# Altium PCB frontbreakoutPCB.PcbDoc (part 1 of 2)
Units mil, origin at the board's own origin, x right, y up, seen from the top; angles counter-clockwise.
Board outline 4390 x 2730 mil, 2 copper layers (Top Layer, Bottom Layer); 90 components, 124 nets, 373 pads, 85 vias.
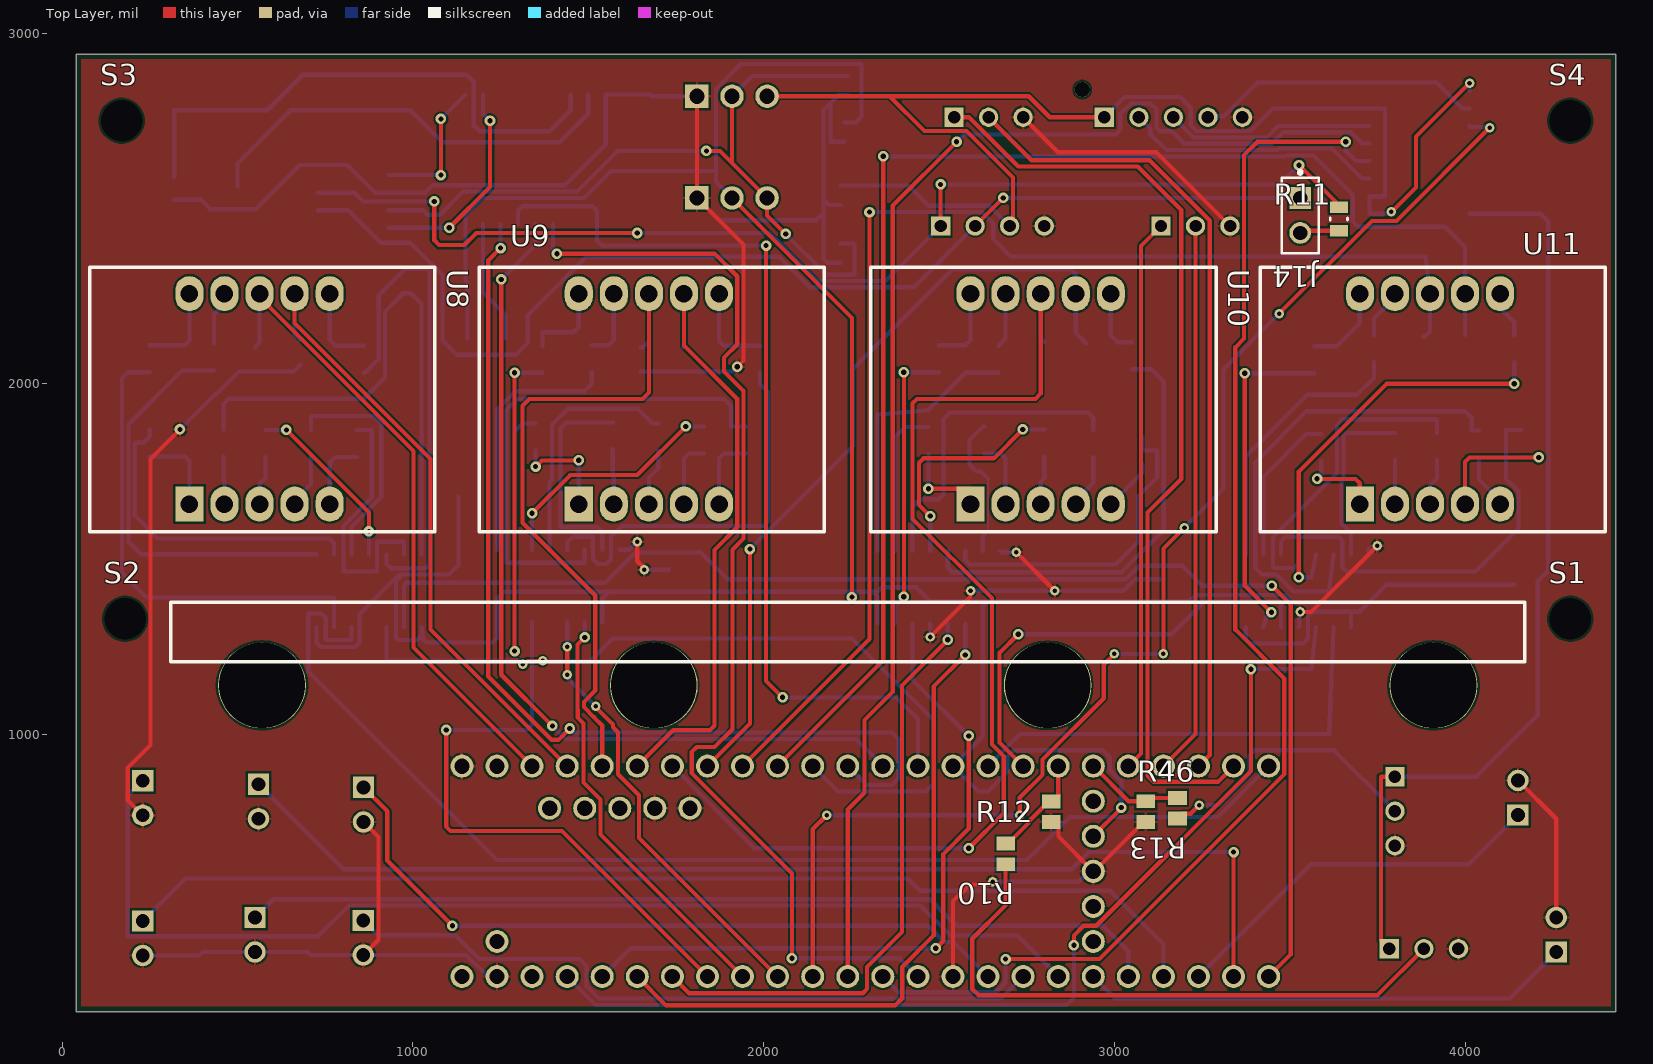
[diagram p0: Top Layer view]
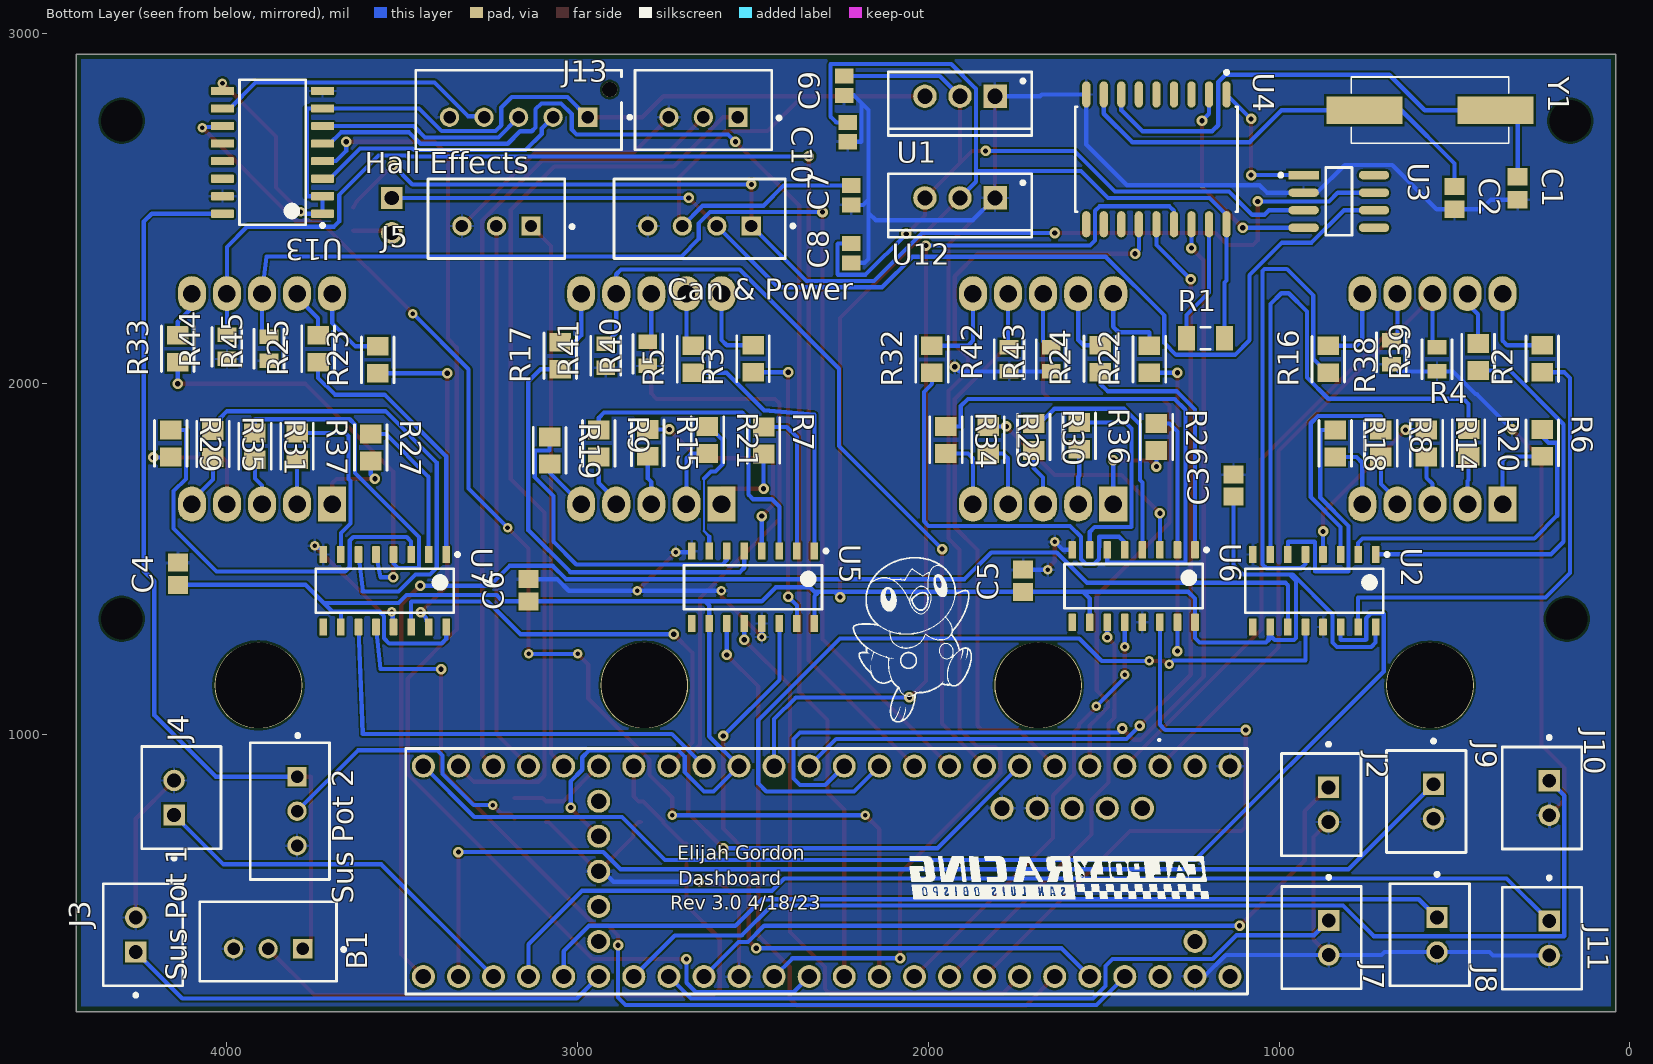
[diagram p1: Bottom Layer view, seen from below]
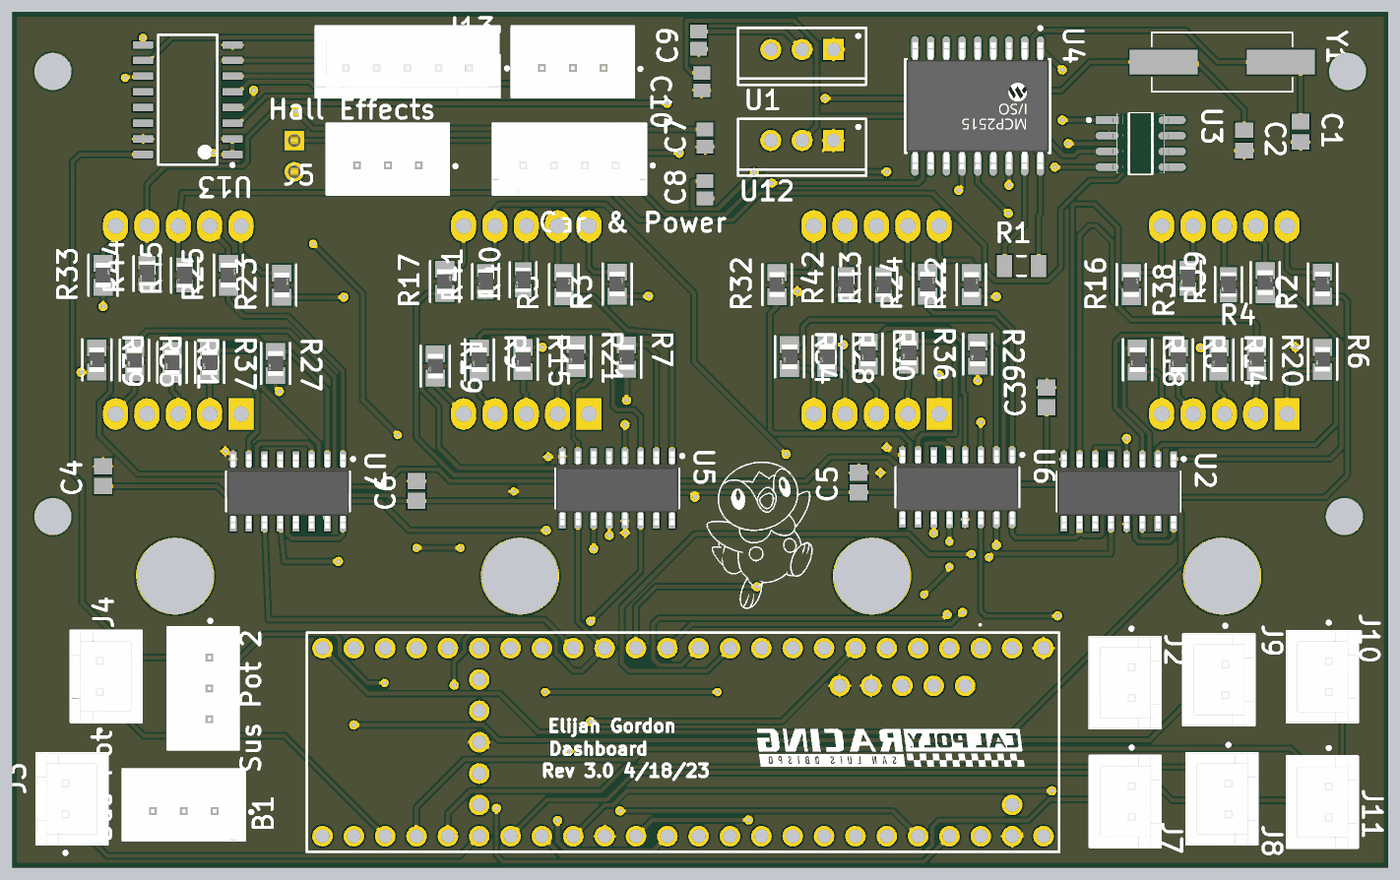
[diagram p2: 3D render of the assembled board from below, using the file's embedded part models]

## Layer stack, top to bottom
Top Solder: solder mask 0.4, Solder Resist, Dk 3.5
Top Layer: signal copper 1.4
Dielectric 1: dielectric 12.6, FR-4, Dk 4.8
Bottom Layer: signal copper 1.4
Bottom Solder: solder mask 0.4, Solder Resist, Dk 3.5

## Board outline
40,210 40,2940 4430,2940 4430,210

## Design rules (kind name [scope] priority, off if disabled: settings)
BoardOutlineClearance [All] p1: gap=15 ignorepadtopadclearanceinfootprint=FALSE
Clearance [All] p1: gap=6 ignorepadtopadclearanceinfootprint=FALSE except(0: Arc-Hole Track-Hole SMDPad-Hole THPad-Hole Via-Hole Fill-Hole Poly-Hole Region-Hole Text-Hole)
ComponentClearance [All] p1: gap=1 collisioncheckmode=3 verticalgap=1 showdistances=FALSE
DiffPairsRouting [All] p1: maxlimit=393.7 minlimit=6 mostfreqgap=8 toplayer_minwidth=6 toplayer_maxwidth=15 toplayer_prefwidth=8 bottomlayer_minwidth=6 bottomlayer_maxwidth=15 bottomlayer_prefwidth=8 maxuncoupledlength=500
HoleSize [All] p1: absolutevalues=TRUE maxlimit=265 minlimit=13 maxpercent=80.000 minpercent=20.000
HoleToHoleClearance [All] p1: gap=10 allowstackedmicrovias=FALSE
MinimumAnnularRing [All] p1: minimumring=7
MinimumSolderMaskSliver [All] p1: minsoldermaskwidth=0
PlaneClearance [All] p1: clearance=10
PlaneConnect [All] p1: planeconnectstyle=Direct reliefexpansion=16 reliefentries=4 reliefconductorwidth=6 reliefairgap=6
PolygonConnect [All] p1: connectstyle=Relief reliefconductorwidth=8 reliefentries=4 polygonreliefangle="90 Angle" airgapwidth=6
RoutingCorners [All] p1: cornerstyle=45-Degree minsetback=49.21 maxsetback=49.21
RoutingVias [All] p1: holewidth=15 width=30 viastyle="Through Hole" minholewidth=13 minwidth=27 maxholewidth=100 maxwidth=114
SilkToSilkClearance [All] p1: silktosilkclearance=0
SilkToSolderMaskClearance [IsPad] p1: minsilkscreentomaskgap=6 clearancetoexposedcopper=TRUE
SolderMaskExpansion [All] p1: expansion=2.95 istentingtop=FALSE
Width [All] p1: maxlimit=400 minlimit=6 preferedwidth=12 minimp=50.000000 maximp=50.000000 favimp=50.000000
20 further rules are at their usual default settings.

## Classes and differential pairs
component class moreConnectors: "Hall Effects" R10 R12 R13 R46 "Sus Pot 1" "Sus Pot 2" U13
component class ssegs_and_registers: C3 C4 C5 C6 R2 R3 R4 R5 R6 R7 R8 R9 R14 R15 R16 R17 R18 R19 R20 R21 R22 R23 R24 R25 R26 R27 R28 R29 R30 R31 R32 R33 R34 R35 R36 R37 U2 U5 U6 U7
component class SEX: R38 R39 R40 R41 R42 R43 R44 R45 S1 S2 S3 S4 U8 U9 U10 U11
component class frontbreakoutSchematic: B1 C7 C8 C9 C10 "Can & Power" J2 J3 J4 J5 J7 J8 J9 J10 J11 J13 U1 U12
component class CAN: C1 C2 J14 R1 R11 U3 U4 Y1

## Components (designator, comment, footprint, x,y, rotation, side; value= is the part's Value field where it differs from the comment)
B1 "TEENSY_4.1" TEENSY41 1340,910 r0 bottom
C1 "22pf_MCP1" CAPC2013X145X50NL20T20 320,2557.52 r270 bottom
C2 "22pf_MCP2" CAPC2013X145X50NL20T20 500,2530 r270 bottom
C3 "0.1 µF" CAPC2013X140X50NL20T25 1130,1710 r90 bottom
C4 "0.1 µF" CAPC2013X140X50NL20T25 4140,1458.5 r90 bottom
C5 "0.1 µF" CAPC2013X140X50NL20T25 1730,1438.5 r90 bottom
C6 "0.1 µF" CAPC2013X140X50NL20T25 3140,1411.5 r90 bottom
C7 "1uF" CAPC2013X145X50LL20T25 2220,2537.56 r90 bottom
C8 "1uF" CAPC2013X145X50LL20T25 2220,2372.44 r90 bottom
C9 "1uF" CAPC2013X145X50LL20T25 2240,2850 r90 bottom
C10 "1uF" CAPC2013X145X50LL20T25 2230,2717.56 r90 bottom
"Can & Power" "B4B-XH-A(LF)(SN)" FP-B4B-XH-A_LF_SN-MFG 2652.36,2470.67 r180 bottom
"Hall Effects" "B5B-XH-AM(LF)(SN)" FP-B5B-XH-AM_LF_SN-MFG 3168.43,2780.67 r180 bottom
J2 "B2B-XH-A(LF)(SN)" FP-B2B-XH-A_LF_SN-MFG 880,800 r270 bottom
J3 "B2B-XH-A(LF)(SN)" FP-B2B-XH-A_LF_SN-MFG 4239.33,429.21 r90 bottom
J4 "B2B-XH-A(LF)(SN)" FP-B2B-XH-A_LF_SN-MFG 4130,820 r90 bottom
J5 "B3B-XH-A(LF)(SN)" FP-B3B-XH-A_LF_SN-MFG 3231.57,2470.67 r0 bottom
J7 "B2B-XH-A(LF)(SN)" FP-B2B-XH-A_LF_SN-MFG 879.33,420.79 r270 bottom
J8 "B2B-XH-A(LF)(SN)" FP-B2B-XH-A_LF_SN-MFG 570.67,429.21 r270 bottom
J9 "B2B-XH-A(LF)(SN)" FP-B2B-XH-A_LF_SN-MFG 580.67,809.21 r270 bottom
J10 "B2B-XH-A(LF)(SN)" FP-B2B-XH-A_LF_SN-MFG 250.67,819.21 r270 bottom
J11 "B2B-XH-A(LF)(SN)" FP-B2B-XH-A_LF_SN-MFG 250.67,419.21 r270 bottom
J13 "B3B-XH-A(LF)(SN)" FP-B3B-XH-A_LF_SN-MFG 2641.57,2780.67 r0 bottom
J14 "TSW-102-07-L-S" FP-TSW-102-07-L-S-MFG 3530,2480 r270 top
R1 "10k" RESC3116X65X50NL20T20 1210,2130 r180 bottom
R2 "200" FP-RG2012-IPC_A 250,2071.59 r90 bottom
R3 "200" FP-RG2012-IPC_A 2500,2071.59 r90 bottom
R4 "200" FP-RG2012-IPC_A 432.81,2076.24 r90 bottom
R5 "200" FP-RG2012-IPC_A 2670,2070 r90 bottom
R6 "200" FP-RG2012-IPC_A 250,1831.59 r270 bottom
R7 "200" FP-RG2012-IPC_A 2470,1838.41 r270 bottom
R8 "200" FP-RG2012-IPC_A 710,1830 r270 bottom
R9 "200" FP-RG2012-IPC_A 2940,1830 r270 bottom
R10 "10k_RBP_VD1" RESC2013X60X40LL20T25 2690,660 r270 top
R11 "120_MCP" FP-CRCW0805-e3-IPC_C 3640,2470 r270 top
R12 "10k_RBP_VD1" RESC2013X60X40LL20T25 2820,780 r90 top
R13 "10k_RBP_VD1" RESC2013X60X40LL20T25 3180,790 r270 top
R14 "200" FP-RG2012-IPC_A 580,1830 r270 bottom
R15 "200" FP-RG2012-IPC_A 2800,1831.59 r270 bottom
R16 "200" FP-RG2012-IPC_A 860,2070 r90 bottom
R17 "200" FP-RG2012-IPC_A 3050,2080 r90 bottom
R18 "200" FP-RG2012-IPC_A 840,1830 r270 bottom
R19 "200" FP-RG2012-IPC_A 3080,1810 r270 bottom
R20 "200" FP-RG2012-IPC_A 460,1831.59 r270 bottom
R21 "200" FP-RG2012-IPC_A 2630,1840 r270 bottom
R22 "200" FP-RG2012-IPC_A 1370,2070 r90 bottom
R23 "200" FP-RG2012-IPC_A 3570,2068.41 r90 bottom
R24 "200" FP-RG2012-IPC_A 1510,2071.59 r90 bottom
R25 "200" FP-RG2012-IPC_A 3740,2100 r90 bottom
R26 "200" FP-RG2012-IPC_A 1350,1848.41 r270 bottom
R27 "200" FP-RG2012-IPC_A 3590,1818.41 r270 bottom
R28 "200" FP-RG2012-IPC_A 1830,1840 r270 bottom
R29 "200" FP-RG2012-IPC_A 4160,1830 r270 bottom
R30 "200" FP-RG2012-IPC_A 1700,1848.41 r270 bottom
R31 "200" FP-RG2012-IPC_A 3920,1821.59 r270 bottom
R32 "200" FP-RG2012-IPC_A 1990,2070 r90 bottom
R33 "200" FP-RG2012-IPC_A 4140,2100 r90 bottom
R34 "200" FP-RG2012-IPC_A 1950,1840 r270 bottom
R35 "200" FP-RG2012-IPC_A 4040,1828.41 r270 bottom
R36 "200" FP-RG2012-IPC_A 1570,1851.59 r270 bottom
R37 "200" FP-RG2012-IPC_A 3800,1821.59 r270 bottom
R38 "ESR10EZPJ472" FP-ESR10-IPC_B 680,2090 r90 bottom
R39 "ESR10EZPJ472" FP-ESR10-IPC_B 550,2070 r90 bottom
R40 "ESR10EZPJ472" FP-ESR10-IPC_B 2800,2085.47 r90 bottom
R41 "ESR10EZPJ472" FP-ESR10-IPC_B 2920,2080 r90 bottom
R42 "ESR10EZPJ472" FP-ESR10-IPC_B 1770,2070 r90 bottom
R43 "ESR10EZPJ472" FP-ESR10-IPC_B 1650,2070 r90 bottom
R44 "200" FP-ESR10-IPC_B 4000,2105.47 r90 bottom
R45 "ESR10EZPJ472" FP-ESR10-IPC_B 3880,2100 r90 bottom
R46 "10k_RBP_VD1" RESC2013X60X40LL20T25 3090,780.47 r90 top
S1 "Screw M3" "Screw M3" 4300,1330 r0 top
S2 "Screw M3" "Screw M3" 180,1330 r0 top
S3 "Screw M3" "Screw M3" 170,2750 r0 top
S4 "Screw M3" "Screw M3" 4300,2750 r0 top
"Sus Pot 1" "B3B-XH-A(LF)(SN)" FP-B3B-XH-A_LF_SN-MFG 3882.64,410 r0 bottom
"Sus Pot 2" "B3B-XH-A(LF)(SN)" FP-B3B-XH-A_LF_SN-MFG 3820.67,781.57 r270 bottom
U1 "LD1117V50" TO220 1910,2820 r0 bottom
U2 "SN74HC595DRG3" D0016A_L 900,1410 r270 bottom
U3 "TJA1050T/CM,118" FP-SOT96-1-IPC_A 830,2520 r180 bottom
U4 "MCP2515-I/SO" FP-C04-051-MFG 1350,2640 r270 bottom
U5 "SN74HC595DRG3" D0016A_L 2500,1420 r270 bottom
U6 "SN74HC595DRG3" D0016A_L 1415,1423.35 r270 bottom
U7 "SN74HC595DRG3" D0016A_L 3550,1410 r270 bottom
U8 "Dual Seven Segment Display" DIP10 363,1657 r0 top
U9 "Dual Seven Segment Display" DIP10 1473,1657 r0 top
U10 "Dual Seven Segment Display" DIP10 2590,1657 r0 top
U11 "Dual Seven Segment Display" DIP10 3700,1657 r0 top
U12 "LD1117V33" TO220 1910,2530 r0 bottom
U13 "CD40109BNSR" NS0016A_N 3870,2660 r0 bottom
Y1 "ECS-80-20-5PXDU-TR" XTAL_ECS-80-20-5PXDU-TR 570,2780 r180 bottom

## Footprints (in the part's own frame and the unit in brackets; to place one, negate y for a bottom-side part, rotate by r counter-clockwise, add the part's x,y. Pads: shape width x height; smd on the part's side, far side on the other; paste and mask are expansions set on the pad)
CAPC2013X140X50NL20T25 [mm] "Chip Capacitor, 2-Leads, Body 2.00x1.25mm, IPC Medium Density"
  rect 1.3x1.45 smd: 1(-0.8,0) 2(0.8,0)
  body extent -1.1,-0.72 1.1,0.72, height 1.4
CAPC2013X145X50LL20T25 [mm] "Chip Capacitor, 2-Leads, Body 2.00x1.25mm, IPC High Density"
  rect 1.1x1.35 smd: 1(-0.7,0) 2(0.7,0)
  body extent -1.1,-0.72 1.1,0.72, height 1.45
CAPC2013X145X50NL20T20 [mm] "Chip Capacitor, 2-Leads, Body 2.00x1.25mm, IPC Medium Density"
  rect 1.25x1.45 smd: 1(-0.825,0) 2(0.825,0)
  body extent -1.1,-0.72 1.1,0.72, height 1.45
D0016A_L [mm] "SOIC, 16-Leads, Body 10x4mm, Pitch 1.27mm, IPC High Density"
  rrect18% 1.25x0.55 smd: 1(-2.625,4.445) 2(-2.625,3.175) 3(-2.625,1.905) 4(-2.625,0.635) 5(-2.625,-0.635) 6(-2.625,-1.905) 7(-2.625,-3.175) 8(-2.625,-4.445) 9(2.625,-4.445) 10(2.625,-3.175) 11(2.625,-1.905) 12(2.625,-0.635) 13(2.625,0.635) 14(2.625,1.905) 15(2.625,3.175) 16(2.625,4.445)
  silkscreen extent -2.75,-5 1.6,5.39, body extent -3,-4.95 3,4.95, height 1.59
DIP10 [mil]
  rect 80x100 hole 50: 1(0,0)
  oval 80x100 hole 50: 2(100,0) 3(200,0) 4(300,0) 5(300,600) 6(400,600) 7(400,0) 8(100,600) 9(0,600) 10(200,600)
  silkscreen extent -284,-79 700,675
FP-B2B-XH-A_LF_SN-MFG [mm]
  rect 1.55x1.55 hole 1 paste-1000 mask+0: 1(-1.25,0.525)
  round 1.55 hole 1 paste-1000 mask+0: 2(1.25,0.525)
  silkscreen extent -4.5,-2.88 3.7,2.87, body extent -3.7,-2.88 3.7,2.88, height 7
FP-B3B-XH-A_LF_SN-MFG [mm]
  rect 1.4x1.4 hole 0.9 paste-1000 mask+0: 1(-2.5,0.525)
  round 1.4 hole 0.9 paste-1000 mask+0: 2(0,0.525) 3(2.5,0.525)
  silkscreen extent -5.6,-2.87 4.95,2.88, body extent -4.95,-2.88 4.95,2.89, height 7
FP-B4B-XH-A_LF_SN-MFG [mm]
  rect 1.4x1.4 hole 0.9 paste-1000 mask+0: 1(3.75,-0.525)
  round 1.4 hole 0.9 paste-1000 mask+0: 2(1.25,-0.525) 3(-1.25,-0.525) 4(-3.75,-0.525)
  silkscreen extent -6.2,-2.87 6.87,2.88, body extent -6.2,-2.88 6.2,2.88, height 7
FP-B5B-XH-AM_LF_SN-MFG [mm]
  rect 1.4x1.4 hole 0.9 paste-1000 mask+0: 1(5,-0.525)
  round 1.4 hole 0.9 paste-1000 mask+0: 2(2.5,-0.525) 3(0,-0.525) 4(-2.5,-0.525) 5(-5,-0.525)
  round 1.1 hole 1.1 unplated paste-1000 mask+0: ""(6.6,1.475)
  silkscreen extent -7.45,-2.88 8.17,2.87, body extent -7.45,-2.88 7.45,2.88, height 7
FP-C04-051-MFG [mm]
  rrect100% 1.9x0.6 smd paste+0 mask+0: 1(-4.7,5.08) 2(-4.7,3.81) 3(-4.7,2.54) 4(-4.7,1.27) 5(-4.7,0) 6(-4.7,-1.27) 7(-4.7,-2.54) 8(-4.7,-3.81) 9(-4.7,-5.08) 10(4.7,-5.08) 11(4.7,-3.81) 12(4.7,-2.54) 13(4.7,-1.27) 14(4.7,0) 15(4.7,1.27) 16(4.7,2.54) 17(4.7,3.81) 18(4.7,5.08)
  silkscreen extent -6.42,-5.88 3.8,5.88, body extent -5.15,-5.77 5.15,5.77, height 2.65
FP-CRCW0805-e3-IPC_C [mil]
  rect 31.75x51.5 smd paste+0 mask+0: 1(-33.5,0) 2(33.5,0)
  silkscreen extent -3,-25 3,25, body extent -53,-31 53,31, height 10
FP-ESR10-IPC_B [mil]
  rect 41.66x53.63 smd paste+0 mask+0: 1(-34.53,0) 2(34.53,0)
  silkscreen extent -55,-43 55,43, body extent -39,-25 39,25, height 26
FP-RG2012-IPC_A [mil]
  rect 53.34x61.27 smd paste+0 mask+0: 1(-38.41,0) 2(38.41,0)
  silkscreen extent -65,-46 65,46, body extent -39,-25 39,25, height 20
FP-SOT96-1-IPC_A [mil]
  rect 86.79x23.94 smd paste+0 mask+0: 1(-100.43,75)
  rrect100% 86.79x23.94 smd paste+0 mask+0: 2(-100.43,25) 3(-100.43,-25) 4(-100.43,-75) 5(100.43,-75) 6(100.43,-25) 7(100.43,25) 8(100.43,75)
  silkscreen extent -170,-96 37,96, body extent -118,-96 118,96, height 69
FP-TSW-102-07-L-S-MFG [mm]
  rect 1.57x1.57 hole 1.02 paste-1000 mask+0: 1(-1.27,0)
  round 1.57 hole 1.02 paste-1000 mask+0: 2(1.27,0)
  silkscreen extent -3.25,-1.34 2.73,1.34, body extent -2.83,-1.44 2.83,1.44, height 0.25
NS0016A_N [mm] "SOIC,16-Leads,Body 10.5x5.6mm,Pitch 1.27mm,IPC Medium Density"
  rrect17% 1.65x0.6 smd: 1(-3.625,4.445) 2(-3.625,3.175) 3(-3.625,1.905) 4(-3.625,0.635) 5(-3.625,-0.635) 6(-3.625,-1.905) 7(-3.625,-3.175) 8(-3.625,-4.445) 9(3.625,-4.445) 10(3.625,-3.175) 11(3.625,-1.905) 12(3.625,-0.635) 13(3.625,0.635) 14(3.625,1.905) 15(3.625,3.175) 16(3.625,4.445)
  silkscreen extent -3.75,-5.25 2.4,5.42, body extent -2.8,-5.25 2.8,5.25, height 2
RESC2013X60X40LL20T25 [mm] "Chip Resistor, 2-Leads, Body 2.00x1.25mm, IPC High Density"
  rect 1x1.35 smd: 1(-0.75,0) 2(0.75,0)
  body extent -1.1,-0.72 1.1,0.72, height 0.6
RESC3116X65X50NL20T20 [mm] "Chip Resistor, 2-Leads, Body 3.10x1.60mm, IPC Medium Density"
  rect 1.25x1.8 smd: 1(-1.375,0) 2(1.375,0)
  silkscreen extent -0.35,-0.8 0.35,0.8, body extent -1.65,-0.9 1.65,0.9, height 0.65
"Screw M3" [mm]
  round 0 hole 3: x(0,0)
TEENSY41 [mm]
  round 1.665 hole 1.11: 1(0,0) 2(2.54,0) 3(5.08,0) 4(7.62,0) 5(10.16,0) 6(12.7,0) 7(15.24,0) 8(17.78,0) 9(20.32,0) 10(22.86,0) 11(25.4,0) 12(27.94,0) 13(27.94,15.24) 14(25.4,15.24) 15(22.86,15.24) 16(20.32,15.24) 17(17.78,15.24) 18(15.24,15.24) 19(12.7,15.24) 20(10.16,15.24) 21(7.62,15.24) 22(5.08,15.24) 23(2.54,15.24) 24(33.02,0) 25(35.56,0) 26(38.1,0) 27(40.64,0) 28(43.18,0) 29(45.72,0) 30(48.26,0) 31(50.8,0) 32(53.34,0) 33(53.34,15.24) 34(50.8,15.24) 35(48.26,15.24) 36(45.72,15.24) 37(43.18,15.24) 38(40.64,15.24) 39(38.1,15.24) 40(35.56,15.24) 41(33.02,15.24) 42(30.48,0) 43(40.64,2.54) 44(40.64,5.08) 45(40.64,7.62) 46(40.64,10.16) 47(40.64,12.7) 48(11.43,3.05) 49(8.89,3.05) 50(6.35,3.05) 51(3.81,3.05) 52(1.27,3.05) 53(0,15.24) 55(-5.08,15.24) 57(-2.54,0) 68(-2.54,12.7) 69(30.48,15.24) 70(-2.54,15.24) 71(-5.08,0)
  silkscreen extent -6.35,-1.95 54.61,16.51
TO220 [mm] "TO, Thru-Hole, Vertical, Heatsink Mounted; 3 In-Line Leads; Pitch 2.54 mm"
  rect 1.7x1.7 hole 1.1: 1(-2.54,0)
  round 1.7 hole 1.1: 2(0,0) 3(2.54,0)
  silkscreen extent -5.2,-1.75 5.2,2.85, body extent -5.25,-1.8 5.25,2.9, height 19.7
XTAL_ECS-80-20-5PXDU-TR [mm]
  rect 5.5x2 smd: 1(-4.75,0) 2(4.75,0)
  silkscreen extent -5.7,-2.4 5.7,2.4

## Part data
B1: "Teensy 4.1 Development Board", Manufacturer_Name=PJRC, Manufacturer_Part_Number="TEENSY 4.1", Datasheet Link=https://www.pjrc.com/store/teensy41.html
C1 C2: library part CMP-1036-01227-2, Manufacturer=Vitramon, Part Number=VJ0805A220GXXCW1BC
C3 C4 C5 C6: library part CMP-2007-04629-1, Manufacturer="AVX Interconnect / Elco", Part Number=08055C104K4Z2A
C7 C8 C9 C10: library part CMP-1036-04746-2, "C0805C105K4PACTU", Manufacturer=Kemet, Part Number=C0805C105K4PACTU
"Can & Power": library part CMP-17439-000250-1, "CONN HEADER VERT 4POS 2.5MM", Color=Natural, Contact Resistance=20mR, Current Rating=3A, Flammability Rating="UL94 V-0", Housing Color=White, Insulation Resistance=1GR, Max Operating Temperature=85°C, Max Voltage Rating (AC)=250V, Min Operating Temperature=-25°C, Package Quantity=500, Connector Type=Header, Contact Finish - Mating=TIN, Contact Material=Brass, Contact Plating=Tin, Contact Shape=Square, Contact Type="Male Pin", Depth=5.75mm, Fastening Type=Detent, Gender=Male, Housing Material=Polyamide, Insulation Color=Natural, Insulation Material=Nylon, Lead Free="Lead Free", Lead Pitch=2.5mm, Length=12.4mm, Mated Stacking Heights=9.8mm, Material=Polyamide, Max Current Rating=3A, Max Voltage Rating (DC)=250V, Mount="Through Hole", Number of Contacts=4, Number of Positions=4, Number of Rows=1, Orientation=Straight, Packaging=Bulk, Pitch=2.5mm, REACH SVHC="No SVHC", Series=XH, Termination=Solder, Voltage Rating=250V, Voltage Rating (AC)=250V, Wire/Cable Gauge=22AWG
"Hall Effects": library part CMP-17439-000304-1, "CONN HEADER VERT 5POS 2.5MM", Color=Green, Contact Resistance=20mR, Flammability Rating="UL94 V-0", Housing Color=White, Insulation Color=Natural, Max Current Rating=3A, Max Operating Temperature=85°C, Max Voltage Rating (AC)=250V, Min Operating Temperature=-25°C, Connector Type=Header, Contact Finish - Mating=TIN, Contact Material=Brass, Contact Plating=Copper, Contact Shape=Square, Contact Type="Male Pin", Depth=5.75mm, Fastening Type=Detent, Housing Material=Polyamide, Insulation Material=Nylon, Lead Free="Lead Free", Length=14.9mm, Mated Stacking Heights=9.8mm, Mount="Through Hole", Number of Positions=5, Number of Rows=1, Orientation=Straight, Packaging=Bulk, Pitch=2.5mm, Series=XH, Termination=Solder, Voltage Rating=250V
J2 J3 J4 J7 J8 J9 J10 J11: library part CMP-2000-05888-3, "CONN HEADER VERT 2POS 2.5MM", Color=Natural, Contact Resistance=20mR, Current Rating=3A, Housing Color=White, Insulation Resistance=1GR, Max Operating Temperature=85°C, Max Voltage Rating (AC)=250V, Min Operating Temperature=-25°C, Connector Type="Male Pin", Contact Material=Brass, Contact Plating=Tin, Contact Type="Male Pin", Depth=5.75mm, Fastening Type=Detent, Housing Material=Polyamide, Lead Free="Lead Free", Lead Pitch=2.5mm, Length=7.4mm, Max Current Rating=3A, Max Voltage Rating (DC)=250V, Mount="Through Hole", Number of Contacts=2, Number of Positions=2, Number of Rows=1, Orientation=Straight, Packaging=Bulk, Pitch=2.5mm, REACH SVHC="No SVHC", Series=XH, Termination=Solder, Voltage Rating=250V, Voltage Rating (AC)=250V, Wire/Cable Gauge=22AWG
J5 J13 "Sus Pot 1" "Sus Pot 2": library part CMP-17439-000014-3, "CONN HEADER VERT 3POS 2.5MM", Color=Natural, Contact Resistance=20mR, Current Rating=3A, Flammability Rating="UL94 V-0", Housing Color=White, Insulation Resistance=1GR, Max Operating Temperature=85°C, Max Voltage Rating (AC)=250V, Min Operating Temperature=-25°C, Connector Type=Header, Contact Finish - Mating=TIN, Contact Material=Brass, Contact Plating=Tin, Contact Shape=Square, Contact Type="Male Pin", Depth=5.75mm, Fastening Type=Detent, Gender=Male, Housing Material=Polyamide, Insulation Color=Natural, Insulation Material=Nylon, Lead Free="Lead Free", Lead Pitch=2.5mm, Length=9.9mm, Max Current Rating=3A, Max Voltage Rating (DC)=250V, Mount="Through Hole", Number of Contacts=3, Number of Positions=3, Number of Rows=1, Orientation=Straight, Packaging=Bulk, Pitch=2.5mm, REACH SVHC="No SVHC", Series=XH, Termination=Solder, Voltage Rating=250V, Voltage Rating (AC)=250V, Wire/Cable Gauge=22AWG
J14: library part CMP-02766-001428-1, "CONN HEADER VERT 2POS 2.54MM", Color=Black, Current Rating=7.6A, Max Operating Temperature=125°C, Max Voltage Rating (AC)=550V, Min Operating Temperature=-55°C, Package Quantity=1, Connector Type="Male Pin", Contact Material=Bronze, Contact Mating Length=0.23inch, Contact Plating=Gold, Contact Type="Male Pin", Depth=2.54mm, Gender=Male, Housing Color=Black, Housing Material=Polyester, Lead Free="Lead Free", Length=5.08mm, Max Current Rating=7.6A, Mount="Through Hole", Number of Contacts=2, Number of Positions=2, Number of Rows=1, Orientation=Straight, Packaging=Bulk, Pitch=2.54mm, Radiation Hardening=No, REACH SVHC="No SVHC", RoHS Compliant=Yes, Series=TSW, Termination=Solder, Voltage Rating=550V, Width=2.54mm
R1: library part CMP-2003-04883-1, "CRCW120610K0FKEAHP", Manufacturer="Vishay Dale", Part Number=CRCW120610K0FKEAHP
R2 R3 R4 R5 R6 R7 R8 R9 R14 R15 R16 R17 R18 R19 R20 R21 R22 R23 R24 R25 R26 R27 R28 R29 R30 R31 R32 R33 R34 R35 R36 R37: library part CMP-2001-02821-2, "Automotive Metal Thin Film Chip Resistor, 0805, 200Ω, 0.1%, 25ppm/°C, 0.125W, 150VRG2012P-201-B-T5", Case Code (Imperial)=0805, Case Code (Metric)=2012, Max Operating Temperature=155°C, Max Power Dissipation=125mW, Min Operating Temperature=-55°C, Package Quantity=5000, Power Rating=100mW, Resistance=200R, Temperature Coefficient=25ppm/°C, Tolerance=0.1%, Voltage Rating=100V, Voltage Rating (DC)=150V, Case/Package=0805, Features="Automotive AEC-Q200", Height=0.4mm, Lead Free="Lead Free", Length=2mm, Number of Terminations=2, Packaging="Tape and Reel", RoHS Compliant=Yes, Series=RG, Size Code=0805, Termination=SMD/SMT, Width=1.25mm
R10 R12 R13 R46: library part CMP-2001-00877-1, Manufacturer=Panasonic, Part Number=ERA6AEB7870V
R11: library part CMP-02407-009256-1, "RES Thick Film, 4.02Ω, 1%, 0.125W, 200ppm/°C, 0805", Case Code (Imperial)=0805, Case Code (Metric)=2012, Max Operating Temperature=155°C, Max Power Dissipation=125mW, Min Operating Temperature=-55°C, Package Quantity=5000, Resistance=4.02R, Temperature Coefficient=200ppm/°C, Tolerance=1%, Voltage Rating=150V, Case/Package=0805, Composition="Thick Film", Contact Plating=Tin, Features="Automotive AEC-Q200", Height=0.02inch, Lead Free="Lead Free", Length=0.079inch, Number of Terminations=2, Packaging="Tape and Reel", Power Rating=125mW, Radiation Hardening=No, Voltage Rating (DC)=150V, Weight=0.000194oz, Width=0.049inch
R38 R39 R40 R41 R42 R43 R44 R45: library part CMP-08839-001245-1, "4.7kΩ ±5% 0.4W 0805 Anti-Surge Chip Resistor AEC-Q200", Case Code (Imperial)=0805, Case Code (Metric)=2012, Max Power Dissipation=400mW, Resistance=4.7kR, Temperature Coefficient=200ppm/°C, Tolerance=5%, Case/Package=0805, Features="Automotive AEC-Q200", Lead Free="Lead Free", Number of Terminations=2, Packaging="Tape and Reel", Power Rating=400mW, RoHS Compliant=Yes, Series=ESR, Size Code=0805
U1: library part CMP-0244-00472-1, "Fixed Low Drop Positive Voltage Regulator, 5V, 3-Pin TO-220", ComponentLink1Description="Manufacturer URL", ComponentLink1URL=http://www.st.com, ComponentLink2Description=Datasheet, ComponentLink2URL=http://www.st.com/internet/com/TECHNICAL_RESOURCES/TECHNICAL_LITERATURE/DATASHEET/CD00000544.pdf, ComponentLink3Description="Package Specification", ComponentLink3URL=http://www.st.com/internet/com/TECHNICAL_RESOURCES/TECHNICAL_LITERATURE/PACKAGE_INFORMATION/CD00004649.pdf, DatasheetVersion=1/11/2011, PackageDescription="TO, Thru-Hole, Vertical, Heatsink Mounted; 3 In-Line Leads; Pitch 2.54 mm", PackageReference=TO220, PackageVersion=ver3.0
U2 U5 U6 U7: library part CMP-0780-00040-3, "8-Bit Shift Registers With 3-State Output Registers, D0016A, LARGE T&R", F @ Nom Voltage(Max)(Mhz)=28, Generic Part Number=SN74HC595, ICC @ Nom Voltage(Max)(mA)=0.08, Manufacturer="Texas Instruments", Operating Temperature Range(C)="-40 to 85", Rating=Military, tpd @ Nom Voltage(Max)(ns)=34, Voltage(Nom)(V)=6, 3-State Output=Yes, Bits=8, Code_JEDEC="MS-012 variation AC", DatasheetVersion=SCLS041H, Input Type=CMOS, Output Drive (IOL/IOH)(Max)(mA)=7.8/-7.8, Output Type=CMOS, PackageReference=D0016A, PackageVersion=http://www.ti.com/lit/ml/mpds178g/mpds178g.pdf, Technology Family=HC, VCC(Max)(V)=6, VCC(Min)(V)=2
U3: library part CMP-2000-04923-2, "IC TRANSCEIVER HALF 1/1 8SO", Case/Package=SO, Max Operating Temperature=150°C, Max Supply Current=10mA, Max Supply Voltage=5.25V, Min Operating Temperature=-40°C, Min Supply Voltage=4.75V, Package Quantity=2500, Contact Plating=Gold, Data Rate=1Mbps, Interface=CAN, Lead Free="Lead Free", Mount="Surface Mount", Nominal Supply Current=10mA, Number of Pins=8, Number of Receive Buffers=1, Number of Transceivers=1, Number of Transmit Buffers=1, Packaging="Tape and Reel", Radiation Hardening=No, REACH SVHC="No SVHC", Receiver Hysteresis=70mV, Simplex/Duplex="Half Duplex"
U4: library part CMP-0186-00133-3, "IC CAN CONTROLLER W/SPI 18SOIC", Ambient Temperature Range High=+125°C, Ambient Temperature Range Low=-65°C, Manufacturer=Microchip, Max Supply Voltage=5.5V, Min Supply Voltage=2.7V, Nominal Supply Current=10mA, Package=C04-051, Temperature="-40°C to +85°C", Temperature Range High=+85°C, Temperature Range Low=-40°C, Automotive=No, Category=IC, ComponentLink2Description=Datasheet, ComponentLink2URL=http://ww1.microchip.com/downloads/en/DeviceDoc/MCP2515-Stand-Alone-CAN-Controller-with-SPI-20001801J.pdf, Device Class L1="Integrated Circuits (ICs)", Device Class L2="Interface ICs", Device Class L3=Controllers, Digikey Description="IC CAN CONTROLLER W/SPI 18SOIC", Footprint Url=http://ww1.microchip.com/downloads/en/DeviceDoc/18L_SOIC_Wide_7.50_SO_C04-0051D.pdf, Function=Controller, Height=2.65mm, Interface=SPI,CAN, Ipc Land Pattern Name=SOIC127P1030X265-18, Lead Free=Yes, Manufacturer Part Number=MCP2515-I/SO, Mouser Description="CAN Interface IC W/ SPI Interface", Octopart=https://octopart.com/mcp2515-i%2Fso-microchip-430187, RoHS=TRUE, Standoff Height=0.1mm
U8 U9 U10 U11: library part Component_1
U12: library part CMP-0244-00470-1, "Fixed Low Drop Positive Voltage Regulator, 3.3V, 3-Pin TO-220", ComponentLink1Description="Manufacturer URL", ComponentLink1URL=http://www.st.com, ComponentLink2Description=Datasheet, ComponentLink2URL=http://www.st.com/internet/com/TECHNICAL_RESOURCES/TECHNICAL_LITERATURE/DATASHEET/CD00000544.pdf, ComponentLink3Description="Package Specification", ComponentLink3URL=http://www.st.com/internet/com/TECHNICAL_RESOURCES/TECHNICAL_LITERATURE/PACKAGE_INFORMATION/CD00004649.pdf, DatasheetVersion=1/11/2011, PackageDescription="TO, Thru-Hole, Vertical, Heatsink Mounted; 3 In-Line Leads; Pitch 2.54 mm", PackageReference=TO220, PackageVersion=ver3.0
U13: library part CMP-1527-00005-2, "CMOS Quad Low-to-High Voltage Level Shifter, 3 to 18 V, -55 to 125 degC, 16-Pin SO (NS16), RoHS, Tape and Reel", Manufacturer="Texas Instruments", Package Reference=NS0016A, Temperature Range="-55 to 125 degC", ComponentLink1Description="Manufacturer URL", ComponentLink1URL=www.ti.com, ComponentLink2Description=Datasheet, ComponentLink2URL=http://www.ti.com/lit/ds/symlink/cd40109b.pdf, ComponentLink3Description="Package Specification", ComponentLink3URL=http://www.ti.com/lit/ml/msop002a/msop002a.pdf, DatasheetVersion=SCHS099B, Mounting Technology="Surface Mount", Number of Bits=4, Number of Channels=4, Number of Outputs=4, PackageDescription="16-Pin Plastic Small Outline Package, Body 10.2 x 5.3 mm, Pitch 1.27 mm", PackageVersion=4040062/C, Packing="Tape and Reel", PartNumber=CD40109BNSR, Propagation Delay="240 ns Max.", RoHS=TRUE, VSS="3 to 18 V"
Y1: "8MHz Â±30ppm Crystal 20pF 60 Ohms HC-49/US", Package="HC49/US ECS International", Availability=Unavailable, MF="ECS Inc.", MP=ECS-80-20-5PXDU-TR, Price=None, SnapEDA_Link=https://www.snapeda.com/parts/ECS-80-20-5PXDU-TR/ECS%20Inc./view-part/584052/?ref=snap

## Free pads (board coordinates)
  oval 250x244 hole 244 mask+2.5: 35(570,1140) 35(1687,1140) 35(2810,1140) 35(3910,1140)

## Via types
v1: diameter 30, hole 15, Top Layer to Bottom Layer, 61 vias
v2: diameter 27, hole 13, Top Layer to Bottom Layer, 24 vias

## Nets (pads, with @x,y where several pads share a name; then routed paths per layer and width w, separated by ;. In a path a pad name is that pad's centre, name@x,y a point inside that pad or via, vN(x,y) a via of type N, cw(c..) or ccw(c..) an arc to the next point about the centre after c; other vN are vias at no path point)
3.3v: B1.42 B1.44 C3.1 C4.1 C5.1 C6.1 C10.2 R1.2 U2.10 U2.16 U4.18 U5.10 U5.16 U6.10 U6.16 U7.10 U7.16 U12.2 | length 9888.4
  Top Layer w12: U12.2 2252,2188 v1(2252,1392) ; B1.44 2940,711 3020,791 v1(3020,792)
  Bottom Layer w12: U2.16 725,1262.5 737.5,1250 835.5,1250 848,1262.5 848,1343 961,1456 970,1456 ; C3.1 1130,1483 1103,1456 970,1456 ; R1.2 1155.87,2289 1150,2294.87 U4.18 1150,2481 1199,2530 1488,2530 1565,2607 1864,2607 ; U6.10 1540,1387.5 1559.51,1407.01 ; U12.2 1864,2576 1864,2607 ; C10.2 2262.5,2745.12 2279,2761.62 2279,2911 2278,2912 1935,2912 1864,2841 1864,2607 ; v1(2252,1392) 2267.01,1407.01 ; U5.16 2325,1394.51 2318.5,1401 2324.51,1407.01 ; v1(3020,792) 3020,866.68 2987.03,899.65 2987.03,935.47 2967.5,955 2712.5,955 2695,937.5 2695,893 2639.5,837.5 2612.5,837.5 B1.42 2625,995 U5.10 2625,1367.5 2637.5,1380 ; U7.16 3375,1272.5 3387.5,1260 3537.5,1260 3552,1274.5 3552,1337.5 3564.5,1350 3675,1350 ; U7.10 3675,1350 ; C4.1 3776.01,1427.01 3724,1375 ; 970,1456 952,1438 952,1275 957.5,1269.5 1012.5,1269.5 1025,1282 ; 1025,1282 U2.10 1031.18,1268.82 ; 1025,1282 1025,1275 1031.18,1268.82 ; 1031.18,1268.82 1037.5,1262.5 1227.5,1262.5 1240,1275 U6.16 1240,1387.5 1259.51,1407.01 1559.51,1407.01 ; 1559.51,1407.01 C5.1 2267.01,1407.01 ; 2267.01,1407.01 2324.51,1407.01 ; 2324.51,1407.01 2337.5,1420 2435,1420 2475,1380 2637.5,1380 ; 2637.5,1380 C6.1 3213.5,1380 3231,1397.5 3488,1397.5 3510.5,1375 3724,1375 ; 3675,1350 3699,1350 3724,1375
+3V3: "Sus Pot 1.1" "Sus Pot 2.1" U13.16 | length 2673.1
  Top Layer w12: 3784.21,389.33 3760,413.54 3760,879 3761,880 3800,880
  Bottom Layer w12: 3800,880 4032,880 4207,1055 4207,1437 4237,1467 4237,2462.5 4214.5,2485 U13.16
+5: C8.2 C9.2 U1.2 U3.3 U12.3 | length 2255.1
  Top Layer w12: v1(1837,2664) 1876,2664 1910,2630 ; U1.2 1910,2630 ; v1(2063,2427.22) 2010,2480.22 U12.3 1910,2630
  Bottom Layer w12: U3.3 1029,2495 1042,2482 1077,2482 1143,2548 1468,2548 1584,2664 v1(1837,2664) ; U1.2 1967.56,2877.56 C9.2 ; v1(2063,2427.22) 2179,2311.22 2258,2311.22 2259,2312.22 2259,2399 2258,2400 C8.2
GND: "Can & Power.4" "Hall Effects.5" "Sus Pot 1.3" "Sus Pot 2.3" B1.45 B1.48 B1.49 B1.69 B1.70 B1.71 C1.2 C2.2 C3.2 C4.2 C5.2 C6.2 C7.1 C8.1 C9.1 C10.1 J2.2 J3.2 J4.2 J5.3 J7.2 J8.2 J9.2 J10.2 J11.2 J13.3 R12.1 R38.1 R39.1 R40.1 R41.1 R42.1 R43.1 R44.1 R45.1 R46.1 U1.1 U2.8 U2.13 U3.2 U4.9 U5.8 U5.13 U6.8 U6.13 U7.8 U7.13 U12.1 U13.8 U13.15 | length 11046.6
  Top Layer w12: J10.2 187,813 187,905 252,970 252,1786 v1(336,1870) ; J7.2 902,414.91 902,708.12 J2.2 ; v2(1640,1550) 1640,1494.06 1660,1474.06 v2(1660,1470) ; U1.1 U12.1 1943,2397 1943,2066.53 v1(1925,2048.53) ; v2(2475,1278.12) 2590,1393.12 v2(2590,1410) ; B1.69 2540,525 2587.78,572.78 2652.78,572.78 v2(2652.78,580.28) ; v2(2720,1520) v2(2830,1410) ; J13.3 2840,2660 3120,2660 J5.3 ; R12.1 2826.89,750.47 2840.57,736.79 2840.57,709.43 B1.45 2942.17,610 3083.11,750.94 R46.1 ; v2(3529.5,1349.5) 3561.15,1349.5 v2(3750,1538.35) ; J4.2 4260,759.88 J3.2
  Bottom Layer w12: J11.2 390,370 400,380 J8.2 700,380 708.43,371.57 J7.2 1152.43,371.57 1214,310 B1.70 ; C1.2 396,2525.04 423.52,2497.52 C2.2 551,2497.52 677.48,2624 813,2624 892,2545 U3.2 1035.08,2545 1056.08,2566 1434,2566 1550,2682 U4.9 1677,2825.04 1682.04,2820 U1.1 ; v1(336,1870) 436.94,1970.94 440.21,1970.94 504.74,2035.47 R39.1 660,2035.47 R38.1 ; U6.8 1616.24,1526.69 1639.54,1550 v2(1640,1550) ; v2(1660,1470) C5.2 ; R42.1 R43.1 1911.94,2035.47 v1(1925,2048.53) ; U12.1 1873.47,2466.53 2150.03,2466.53 2171,2487.5 ; C8.1 2182,2344.88 2171,2355.88 2171,2487.5 ; C7.1 2186,2510 2171,2525 ; C10.1 2192,2690 2191,2691 2191,2800.94 ; C9.1 2212.5,2822.44 2191,2800.94 ; v2(2475,1278.12) U5.13 ; v2(2590,1410) v2(2830,1410) 3025.46,1410 3058.45,1442.99 C6.2 ; v2(2652.78,580.28) 2897.92,580.28 2927.64,610 B1.45 ; U5.8 2678.35,1520 v2(2720,1520) ; U7.13 3527.25,1308.9 3527.25,1347.25 v2(3529.5,1349.5) ; U7.8 3725,1527.13 3729.83,1531.95 3739.55,1531.95 3745.94,1538.35 v2(3750,1538.35) ; 2171,2487.5 2171,2525 ; 2171,2525 2171,2780.94 2191,2800.94
HALL1_IN: "Hall Effects.2" U13.3 | length 742.7
  Bottom Layer w12: 3070,2760 3102.31,2727.69 3102.31,2712.5 3148.37,2666.44 3466.11,2666.44 3470.95,2671.28 3620.33,2671.28 3706.61,2585 U13.3
HALL1_TNC: B1.14 U13.4 | length 3704.4
  Top Layer w12: v1(2690,360) 2957.28,360 3484.78,887.5 3484.78,1159.22 3345,1299 3345,2104 3370,2129 3370,2652 3408,2690 v1(3660,2690)
  Bottom Layer w12: B1.14 2384.78,265.22 2662.72,265.22 2690,292.5 v1(2690,360) ; v1(3660,2690) 3660,2664 3689,2635 U13.4
HALL2_IN: "Hall Effects.3" U13.6 | length 596.2
  Bottom Layer w12: 3168.43,2760 3225.99,2702.44 3434.95,2702.44 3467.51,2735 U13.6
HALL2_TNC: B1.15 U13.5 | length 3861.4
  Top Layer w12: B1.15 2240,786 2288,834 2288,1041 2368,1121 2368,2507.5 v1(2550.34,2689.84)
  Bottom Layer w12: v1(2550.34,2689.84) 2571.5,2711 3003,2711 3017,2725 3017,2769 3047.56,2799.56 3103.44,2799.56 3120,2783 3120,2731 3131,2720 3163.95,2720 3199.51,2684.44 3448.44,2684.44 3481,2717 3675,2717 3707,2685 U13.5
HALL_IN: "Hall Effects.4" U13.10 | length 817.4
  Bottom Layer w12: 3266.85,2760 3269.93,2763.08 3312.41,2763.08 3408.14,2858.81 3918.24,2858.81 3992.05,2785 U13.10
HALL_TNC: B1.16 U13.11 | length 3724
  Top Layer w12: B1.16 2140,730 v2(2180,770) ; v2(2730,770) 2730.27,770.27 2730.27,820.27 2795.22,885.22 2795.22,928.55 2970,1103.32 2970,1200 v2(3000,1230) ; v2(3140,1230) 3140,1530 v2(3200,1590) ; v2(3470,2200) 3734.5,2464.5 3804.5,2464.5 v2(4070,2730)
  Bottom Layer w12: v2(2180,770) v2(2730,770) ; v2(3000,1230) v2(3140,1230) ; v2(3200,1590) 3311.43,1701.43 3311.43,2041.43 v2(3470,2200) ; U13.11 4015.22,2732.5 4067.5,2732.5 v2(4070,2730)
NetB1_1: B1.1 R39.2 U8.10 | length 1826.7
  Top Layer w12: U8.10 563,2247 1002,1808 1002,1248 B1.1
  Bottom Layer w12: R39.2 563,2117.53 U8.10
NetB1_2: B1.2 R38.2 U8.5 | length 1809.6
  Top Layer w12: U8.5 663,2173 1050.65,1785.35 1050.65,1299.35 B1.2
  Bottom Layer w12: U8.5 663,2139.36 677.83,2124.53 R38.2
NetB1_3: B1.3 R43.2 U9.10 | length 1971.2
  Top Layer w12: B1.3 1540,1025.56 1517,1048.56 1517,1049.12 1487.79,1078.33 1487.79,1093.24 1520,1125.46 1520,1397 1313,1604 1313,1937.5 1332.5,1957 1655,1957 1673,1975 U9.10
  Bottom Layer w12: R43.2 1655.98,2104.53 1673,2121.54 U9.10
NetB1_4: B1.4 R42.2 U9.5 | length 1743.2
  Top Layer w12: B1.4 1742.5,1012.5 1847.5,1012.5 1860,1025 1860,1526 1925,1591 1925,1957 1773,2109 U9.5
  Bottom Layer w12: R42.2 1773,2107.53 U9.5
NetB1_5: B1.5 R40.2 U10.10 | length 3162.1
  Top Layer w12: v1(2585,676) 2685,776 2685,937.5 2651,971.5 2651,1389 2425,1615 2425,1944.5 2437.5,1957 2775,1957 2790,1972 U10.10
  Bottom Layer w12: B1.5 1974,676 v1(2585,676) ; U10.10 2790,2130 R40.2
NetB1_6: B1.6 R41.2 U10.5 | length 2273.1
  Top Layer w12: B1.6 1961,1031 v1(1961,1529)
  Bottom Layer w12: v1(1961,1529) 2255,1823 2255,2043 2538,2326 2876.5,2326 2890,2312.5 U10.5 2890,2144.53 R41.2
NetB1_7: B1.7 R45.2 U11.10 | length 3634
  Top Layer w12: B1.7 2302,1272 v1(2302,2489.56)
  Bottom Layer w12: v1(2302,2489.56) 2622.44,2489.56 2655,2457 2655,2412.5 2704.5,2363 3887.5,2363 U11.10 3900,2149.36 3885.17,2134.53 R45.2
NetB1_8: B1.8 R44.2 U11.5 | length 3925.8
  Top Layer w12: B1.8 2341,1211 v1(2341,2648.44)
  Bottom Layer w12: v1(2341,2648.44) 3486.39,2648.44 3488.95,2651 3567.5,2651 3680,2538.5 3680,2462.5 3694.5,2448 3942,2448 4000,2390 U11.5 R44.2
NetB1_9: B1.9 U2.12 | length 2351.4
  Top Layer w12: v2(1314,1200) 1318.06,1200 1328.06,1210 v2(1370,1210)
  Bottom Layer w12: U2.12 925,1212 926,1211 1303,1211 v2(1314,1200) ; v2(1370,1210) 1506,1210 1570,1274 2252,1274 2485,1041 2485,860.5 2462.5,838 2212,838 B1.9
NetB1_10: B1.10 U4.16 | length 2861.8
  Top Layer w12: v1(1250,2387) 1215,2352 1215,1166 1396,985 1415,985 v1(1447.25,1017.25)
  Bottom Layer w12: v1(1250,2387) U4.16 ; v1(1447.25,1017.25) 1458.5,1006 2366.5,1006 2385,987.5 2385,875 2366,856 2294,856 B1.10
NetB1_11: B1.11 U4.14 | length 2521
  Top Layer w12: v1(1252,2297.5) 1252,1170.5 v1(1398,1024.5)
  Bottom Layer w12: v1(1252,2297.5) 1350,2395.5 U4.14 ; v1(1398,1024.5) 1435.5,987 2263,987 B1.11
NetB1_12: B1.12 U4.15 | length 2700.1
  Top Layer w12: v1(2007,2394) 2007,1153 v1(2054,1106)
  Bottom Layer w12: U4.15 1300,2493.5 1312.5,2506 1512.5,2506 1525,2493.5 1525,2408.5 1539.5,2394 v1(2007,2394) ; v1(2054,1106) 2378,1106 2440,1044 B1.12
NetB1_13: B1.13 U4.13 | length 3202.4
  Top Layer w12: v1(1411,2371) 1860.5,2371 1925,2306.5 1925,2112 1887.5,2074.5 1887.5,2035.5 1943,1980 1943,1559 1911,1527 1911,1015 1860.5,964.5 1809.5,964.5 1795,950 1795,890 2081,604 v1(2081,362)
  Bottom Layer w12: U4.13 1400,2382 v1(1411,2371) ; v1(2081,362) 2388,362 B1.13
NetB1_17: B1.17 U6.12 | length 1258.5
  Top Layer w12: v2(1440,1170) v2(1440,1250) ; v2(1521.13,1081.05) 1521.13,1078.83 1570.79,1029.17 1570.79,1020.79 1585,1006.57 1585,887 1645,827 1645,705 B1.17
  Bottom Layer w12: v2(1440,1170) 1440,1162.18 v2(1521.13,1081.05) ; v2(1440,1250) U6.12
NetB1_18: B1.18 U6.11 | length 1213.1
  Top Layer w12: v1(1490,1277) 1469.79,1256.79 1469.79,1070.88 1470,1070.66 1470,1048.74 1487,1031.74 1487,863 1535,815 1535,715 B1.18
  Bottom Layer w12: v1(1490,1277) U6.11
NetB1_19: B1.19 U6.14 | length 1740.8
  Top Layer w12: v1(1095,1013) 1095,737.5 1107.5,725 1425,725 B1.19
  Bottom Layer w12: v1(1095,1013) 1325,1013 1340,1028 U6.14
NetB1_20: B1.20 U5.12 | length 1716.9
  Top Layer w12: B1.20 1787.5,262.5 2282.72,262.5 2295.22,275 2295.22,337.5 2395,437.28 2395,1140 v1(2525,1270)
  Bottom Layer w12: v1(2525,1270) U5.12
NetB1_21: B1.21 U5.11 | length 1940.5
  Top Layer w12: B1.21 1722,228 2375,228 2395.22,248.22 2395.22,337.5 2485,427.28 2485,1137 v1(2575,1227)
  Bottom Layer w12: v1(2575,1227) U5.11
NetB1_22: B1.22 U5.14 | length 2015.7
  Top Layer w12: v1(2491.22,390.78) 2512.5,412.05 2512.5,659.5 2585,732 v1(2585,996)
  Bottom Layer w12: B1.22 1620.78,390.78 v1(2491.22,390.78) ; U5.14 2425,1156 v1(2585,996)
NetB1_23: B1.23 U7.12 | length 2947.5
  Top Layer w12: v1(2885,399) 2885,427.5 2912.5,455 2948.32,455 3389.52,896.2 v1(3389.52,1186.5)
  Bottom Layer w12: B1.23 1521,229 2864,229 2885,250 v1(2885,399) ; v1(3389.52,1186.5) 3562.5,1186.5 U7.12
NetB1_24: B1.24 U7.11 | length 1315.8
  Bottom Layer w12: B1.24 2731.5,1001.5 3612.5,1001.5 U7.11
NetB1_25: B1.25 U7.14 | length 1285.4
  Top Layer w12: v1(2726,1286) 2673,1233 2673,977 B1.25
  Bottom Layer w12: v1(2726,1286) 3163,1286 3256.5,1379.5 3473.51,1379.5 3475,1378.01 U7.14
NetB1_28: B1.28 J5.1 | length 1578.6
  Top Layer w12: B1.28 3076,946 3076,2392.85 J5.1
NetB1_29: B1.29 J5.2 | length 1577.9
  Top Layer w12: B1.29 3231.57,1001.57 J5.2
NetB1_30: B1.30 J13.2 | length 2321.2
  Top Layer w12: J13.2 2764.04,2637.53 3099.98,2637.53 3272,2465.52 3272,942 B1.30
NetB1_31: B1.31 J13.1 | length 2680.3
  Top Layer w12: J13.1 2585.63,2760 2726.09,2619.53 3066.63,2619.53 3190.71,2495.45 3190.71,1728.46 3095,1632.75 3095,882.72 3112.5,865.22 3295.22,865.22 B1.31
NetB1_32: B1.32 U2.14 | length 3461.8
  Bottom Layer w12: U2.14 825,1271 824,1270 753,1270 752,1271 752,1331.5 738.5,1345 703,1345 702,1344 702,1180 1240,642 2751,642 2874,765 3295,765 B1.32
NetB1_33: B1.33 U2.11 | length 3865
  Top Layer w12: B1.33 3502.78,372.78 3502.78,1370.72 v1(3449,1424.5)
  Bottom Layer w12: U2.11 975,1425.5 982.35,1432.85 1547.85,1432.85 1634,1519 1821,1519 1897,1443 3033,1443 3071,1481 3194,1481 3250.5,1424.5 v1(3449,1424.5)
NetB1_34: B1.34 J9.1 | length 3255.7
  Top Layer w12: B1.34 v1(3340,665)
  Bottom Layer w12: J9.1 802.43,616 2878,616 2927,665 v1(3340,665)
NetB1_35: B1.35 J4.1 | length 1101.5
  Bottom Layer w12: B1.35 3560,630 4009.88,630 J4.1
NetB1_36: B1.36 J11.1 | length 3130.4
  Bottom Layer w12: J11.1 351.58,590 2411.14,590 2446.36,554.78 2987.5,554.78 3140,402.28 B1.36
NetB1_37: B1.37 J8.1 | length 2645.3
  Bottom Layer w12: J8.1 602.09,530.51 2474.76,530.51 2550.5,454.78 2967.5,454.78 3040,382.28 B1.37
NetB1_38: B1.38 J3.1 | length 1401
  Bottom Layer w12: B1.38 3002.78,247.22 4127.22,247.22 J3.1
NetB1_39: B1.39 J10.1 | length 3233.8
  Bottom Layer w12: J10.1 187,825.42 187,426 188,425 730.15,425 817.66,512.51 2446.76,512.51 2532.5,426.78 2723.22,426.78 B1.39
NetB1_40: B1.40 J7.1 | length 2033.2
  Bottom Layer w12: J7.1 900.92,427.74 1121.72,427.74 1189.46,360 1475,360 1495,340 1495,282.72 1530.5,247.22 2677.22,247.22 B1.40
NetB1_41: B1.41 J2.1 | length 2086.3
  Top Layer w12: J2.1 927,781.54 927,641 v1(1113,455)
  Bottom Layer w12: v1(1113,455) 2468.28,455 2514.5,408.78 2541.22,408.78 B1.41
NetC1_1: C1.1 U4.7 Y1.2 | length 1570.6
  Bottom Layer w12: C1.1 320,2780 Y1.2 585,2780 686,2881 1153.3,2881 1173.81,2860.49 1173.81,2737.19 1191,2720 1390,2720 1450,2780 U4.7
NetC2_1: C2.1 U4.8 Y1.1 | length 1254.8
  Bottom Layer w12: C2.1 500,2628 652,2780 Y1.1 993,2780 1084,2689 1419,2689 1500,2770 U4.8
NetC7_2: "Can & Power.3" "Hall Effects.1" C7.2 U1.3 U13.1 U13.2 U13.7 U13.9 | length 3916.2
  Top Layer w12: U1.3 2359.44,2820 ; 2701.57,2450 2711,2459.43 2711,2588 2578.56,2720.44 2459,2720.44 2359.44,2820 ; 2971.57,2760 2816,2760 2756,2820 2359.44,2820 ; v2(3790,2490) 3860,2560 3860,2704.57 v2(4012.72,2857.28)
  Bottom Layer w12: C7.2 2412.88,2565.12 2470.44,2507.56 2644.01,2507.56 2701.57,2450 ; 2971.57,2760 3029.13,2817.56 3187.94,2817.56 3218,2787.5 3218,2737 3234.56,2720.44 3387.78,2720.44 3452.34,2785 U13.7 3771,2785 3772,2784 3772,2536 3771,2535 U13.2 U13.1 3780.94,2485 3785.94,2490 v2(3790,2490) ; U13.9 v2(4012.72,2857.28)
"NetCan & Power_1": "Can & Power.1" R11.1 U3.7 | length 3366.4
  Top Layer w12: v1(1061,2520) 1061,2409.5 1075,2395.5 1146.5,2395.5 1181,2430 v1(1640,2430) ; 2504.72,2450 v1(2504.72,2568.53) ; v1(3526.5,2623.5) 3630.12,2519.88 R11.1
  Bottom Layer w12: U3.7 833,2545 858,2520 v1(1061,2520) ; v1(1640,2430) 2018,2430 2154.78,2293.22 2347.95,2293.22 2504.72,2450 ; v1(2504.72,2568.53) 3471.54,2568.53 v1(3526.5,2623.5)
"NetCan & Power_2": "Can & Power.2" J14.1 U3.6 | length 3383.4
  Top Layer w12: 2603.15,2450 v1(2683.15,2530)
  Bottom Layer w12: U3.6 815.11,2495 907.71,2402.39 992.2,2402.39 1084.81,2309.78 1084.81,2124.04 1126.29,2082.57 1293.71,2082.57 1327.37,2116.22 1327.37,2194.91 1494.46,2362 2045.22,2362 2132,2275.22 2428.37,2275.22 2603.15,2450 ; v1(2683.15,2530) J14.1
NetJ14_2: J14.2 R11.2 | length 112.7
  Top Layer w12: J14.2 3536.5,2436.5 R11.2
NetR1_1: R1.1 U4.17 | length 351.5
  Bottom Layer w12: U4.17 1200,2260.13 1264.13,2196 R1.1
NetR2_1: R2.1 U2.15 | length 1358.3
  Bottom Layer w12: R2.1 187.5,2033.18 171,2016.68 171,1461 241,1391 774,1391 775,1390 U2.15
NetR2_2: R2.2 U8.9 | length 252.4
  Bottom Layer w12: R2.2 350,2110 363,2123 U8.9
NetR3_1: R3.1 U5.15 | length 826.9
  Top Layer w12: v1(2400,1393) v1(2400,2033.18)
  Bottom Layer w12: U5.15 2375,1368 v1(2400,1393) ; v1(2400,2033.18) R3.1
NetR3_2: R3.2 U10.9 | length 228.2
  Bottom Layer w12: R3.2 2575,2110 2590,2125 U10.9
NetR4_1: R4.1 U2.1 | length 1193.1
  Bottom Layer w12: R4.1 342.38,2037.82 189.37,1884.81 189.37,1549.63 225,1514 725,1514 U2.1
NetR4_2: R4.2 U8.8 | length 154.9
  Bottom Layer w12: R4.2 432.81,2198.41 463,2228.6 U8.8
NetR5_1: R5.1 U5.1 | length 778.6
  Bottom Layer w12: U5.1 2325,1912 2468.5,1924.5 2575.59,2031.59 R5.1
NetR5_2: R5.2 U10.8 | length 156.9
  Bottom Layer w12: R5.2 2690,2128.41 U10.8
NetR6_1: R6.1 U2.2 | length 909.9
  Bottom Layer w12: R6.1 250,1849.85 232,1831.85 209,1831.85 207.37,1830.22 207.37,1624.13 272.5,1559 762.5,1559 775,1546.5 U2.2
NetR6_2: R6.2 U8.1 | length 241.6
  Bottom Layer w12: R6.2 350,1793.18 363,1780.18 U8.1
NetR7_1: R7.1 U5.2 | length 431.6
  Bottom Layer w12: U5.2 2375,1848 2403.82,1876.82 R7.1
NetR7_2: R7.2 U10.1 | length 263
  Top Layer w12: v1(2470,1701) 2590,1701 U10.1
  Bottom Layer w12: v1(2470,1701) R7.2
NetR8_1: R8.1 U2.3 | length 656.9
  Bottom Layer w12: R8.1 710,1907 711,1908 889.5,1908 910,1887.5 910,1677 825,1592 U2.3
NetR8_2: R8.2 U8.4 | length 154.1
  Bottom Layer w12: U8.4 663,1667 710,1714 R8.2
NetR9_1: R9.1 U5.3 | length 919.7
  Bottom Layer w12: U5.3 2425,1649.5 2446.5,1671 2500,1671 2513,1684 2513,1900 2531,1918 2925,1918 2940,1903 R9.1
NetR9_2: R9.2 U10.4 | length 155.3
  Bottom Layer w12: U10.4 2890,1667 2940,1717 R9.2
NetR14_1: R14.1 U2.4 | length 512.2
  Top Layer w12: v1(639.59,1868.41) 875,1633 v1(875,1579)
  Bottom Layer w12: R14.1 v1(639.59,1868.41) ; U2.4 v1(875,1579)
NetR14_2: R14.2 U8.3 | length 141.6
  Bottom Layer w12: U8.3 563,1715 580,1732 R14.2
NetR15_1: R15.1 U5.4 | length 661.3
  Top Layer w12: v1(2475,1623) 2443,1655 2443,1775 2455.5,1787.5 2656.5,1787.5 v1(2739,1870)
  Bottom Layer w12: U5.4 v1(2475,1623) ; v1(2739,1870) R15.1
NetR15_2: R15.2 U10.3 | length 140.3
  Bottom Layer w12: U10.3 2790,1720 2800,1730 R15.2
NetR16_1: R16.1 U2.5 | length 1414.9
  Bottom Layer w12: R16.1 863.96,2031.59 902.63,2070.26 902.63,2251.77 978.22,2327.36 1041.78,2327.36 1047.83,2321.31 1047.83,1484.91 1036.92,1474 937.5,1474 925,1486.5 U2.5
NetR16_2: R16.2 U8.6 | length 235.9
  Bottom Layer w12: U8.6 763,2125 779.59,2108.41 R16.2
NetR17_1: R17.1 U5.5 | length 1247.8
  Bottom Layer w12: U5.5 2525,1475.5 2537.5,1463 3021,1463 3140.63,1582.63 3140.63,2007.37 3106.41,2041.59 R17.1
NetR17_2: R17.2 U10.6 | length 187.4
  Bottom Layer w12: U10.6 2990,2137.5 3009.09,2118.41 R17.2
NetR18_1: R18.1 U2.6 | length 771.7
  Bottom Layer w12: R18.1 882,1868.41 883,1867.41 883,1676 802,1595 802,1466 803,1465 897,1465 898,1466 898,1549 899,1550 974,1550 975,1549 U2.6
NetR18_2: R18.2 U8.7 | length 201.9
  Bottom Layer w12: U8.7 763,1775 779.59,1791.59 R18.2
NetR19_1: R19.1 U5.6 | length 913.9
  Bottom Layer w12: U5.6 2575,1497.5 2587.5,1485 3004,1485 3069,1550 3069,1680.37 3122.63,1734 3122.63,1809 3121.37,1810.26 3081,1810.26 3080,1811.26 R19.1
NetR19_2: R19.2 U10.7 | length 151.9
  Bottom Layer w12: U10.7 3080,1747 R19.2
NetR20_1: R20.1 U2.7 | length 1605.5
  Bottom Layer w12: R20.1 460,1942.31 475,1957.31 860,1957.31 920.63,2017.95 920.63,2206.38 972.56,2258.3 994.16,2258.3 1025,2227.46 U2.7
NetR20_2: R20.2 U8.2 | length 137.4
  Bottom Layer w12: R20.2 460,1726 463,1723 U8.2
NetR21_1: R21.1 U5.7 | length 410.5
  Bottom Layer w6: 2640,1580 2640,1730
  Bottom Layer w8: 2625,1565 2640,1580
  Bottom Layer w12: U5.7 2625,1565 ; R21.1 2626.04,1878.41 2587.37,1839.74 2587.37,1769.95 2607.31,1750 2620,1750 2640,1730
NetR21_2: R21.2 U10.2 | length 196.3
  Bottom Layer w12: R21.2 2675.91,1801.59 2690,1787.5 U10.2
NetR22_1: R22.1 U6.15 | length 955.6
  Top Layer w12: v1(1290,1238) v1(1290,2031.59)
  Bottom Layer w12: v1(1290,1238) U6.15 ; v1(1290,2031.59) R22.1
NetR22_2: R22.2 U9.9 | length 241.9
  Bottom Layer w12: R22.2 1370,2146 1371,2147 1457.5,2147 1473,2162.5 U9.9
NetR23_1: R23.1 U7.15 | length 960
  Top Layer w12: v1(3372,2030) 3372,1424.5 v1(3448,1348.5)
  Bottom Layer w12: v1(3372,2030) R23.1 ; U7.15 3434.5,1335 v1(3448,1348.5)
NetR23_2: R23.2 U11.9 | length 241.4
  Bottom Layer w12: R23.2 3633.82,2106.82 3700,2173 U11.9
NetR24_1: R24.1 U6.1 | length 733.4
  Bottom Layer w12: U6.1 1240,1926.5 1292.5,1979 1489,1979 1510,2000 R24.1
NetR24_2: R24.2 U9.8 | length 201.2
  Bottom Layer w12: R24.2 1558,2110 1573,2125 U9.8
NetR25_1: R25.1 U7.1 | length 782.5
  Bottom Layer w12: U7.1 3375,1793.65 3550.35,1969 3692.08,1969 3740,2016.92 R25.1
NetR25_2: R25.2 U11.8 | length 143.4
  Bottom Layer w12: R25.2 3740,2187 3800,2247 U11.8
NetR26_1: R26.1 U6.2 | length 406.9
  Bottom Layer w12: U6.2 1290,1864.32 1312.5,1886.82 R26.1
NetR26_2: R26.2 U9.1 | length 301.1
  Top Layer w12: v1(1350,1764) 1367.74,1781.74 v1(1473,1781.74)
  Bottom Layer w12: v1(1350,1764) R26.2 ; U9.1 v1(1473,1781.74)
NetR27_1: R27.1 U7.2 | length 437
  Bottom Layer w12: U7.2 3425,1734.82 3547,1856.82 R27.1
NetR27_2: R27.2 U11.1 | length 242.6
  Top Layer w12: v1(3578,1729) 3687.5,1729 3700,1716.5 U11.1
  Bottom Layer w12: v1(3578,1729) 3590,1741 R27.2
NetR28_1: R28.1 U6.3 | length 696.8
  Top Layer w12: v1(1340,1630.97) 1449.03,1740 1640,1740 v1(1778.41,1878.41)
  Bottom Layer w12: U6.3 v1(1340,1630.97) ; v1(1778.41,1878.41) R28.1
NetR28_2: R28.2 U9.4 | length 193.3
  Bottom Layer w12: U9.4 1773,1787.5 1787.09,1801.59 R28.2
NetR29_1: R29.1 U7.3 | length 1192.7
  Bottom Layer w12: U7.3 3475,1550.5 3487.5,1563 3640,1563 3650,1553 3650,1477.5 3662.5,1465 4029.5,1465 4152,1587.5 4152,1694 4117,1729 4117,1867.41 4118,1868.41 R29.1
NetR29_2: R29.2 U11.4 | length 386.3
  Top Layer w12: U11.4 4000,1777.5 4012.5,1790 v1(4210,1790)
  Bottom Layer w12: R29.2 4161.59,1790 v1(4210,1790)
NetR30_1: R30.1 U6.4 | length 699.3
  Bottom Layer w12: U6.4 1390,1719 1397,1726 1397,1884 1442,1929 1641,1929 1683.18,1886.82 R30.1
NetR30_2: R30.2 U9.3 | length 164.2
  Bottom Layer w12: U9.3 1673,1733 1700,1760 R30.2
NetR31_1: R31.1 U7.4 | length 917.9
  Bottom Layer w12: U7.4 3525,1487.5 3512.5,1475 3453,1475 3452,1476 3452,1563 3635,1746 3635,1884 3650,1899 3919,1899 3920,1898 R31.1
NetR31_2: R31.2 U11.3 | length 134.5
  Bottom Layer w12: U11.3 3900,1710 3920,1730 R31.2
NetR32_1: R32.1 U6.5 | length 1190.5
  Bottom Layer w12: U6.5 1440,1547.39 1456.61,1564 1513,1564 1514,1500 1528,1486 1551,1486 1565,1500 1565,1564 1596,1595 2000,1595 2013,1608 2013,1977 1990,2000 R32.1
NetR32_2: R32.2 U9.6 | length 257.1
  Bottom Layer w12: U9.6 1873,2122.91 1887.5,2108.41 R32.2
NetR33_1: R33.1 U7.5 | length 1183.2
  Top Layer w12: v1(3526,1448.5) 3526,1750 3776,2000 v1(4140,2000)
  Bottom Layer w12: v1(3526,1448.5) 3562.5,1448.5 U7.5 ; v1(4140,2000) R33.1
NetR33_2: R33.2 U11.6 | length 135.2
  Bottom Layer w12: U11.6 4100,2217 4140,2177 R33.2
NetR34_1: R34.1 U6.6 | length 1456.4
  Bottom Layer w12: U6.6 1490,1491 1489,1490 1268,1490 1267,1491 1267,1926 1298,1957 1887.5,1957 1908,1936.5 1908,1879.41 1909,1878.41 R34.1
NetR34_2: R34.2 U9.7 | length 213.3
  Bottom Layer w12: U9.7 1873,1787.5 1887.09,1801.59 R34.2
NetR35_1: R35.1 U7.6 | length 1387.9
  Bottom Layer w12: U7.6 3612.5,1408 3510.5,1408 3462.5,1456 3421,1456 3402,1475 3402,1776 3548,1922 4000,1922 4019,1903 4019,1866.82 R35.1
NetR35_2: R35.2 U11.7 | length 157.9
  Bottom Layer w12: R35.2 4040,1727 4100,1667 U11.7
NetR36_1: R36.1 U6.7 | length 612.6
  Bottom Layer w12: U6.7 1540,1578 1526,1592 1422,1592 1421,1593 1421,1873 1438,1890 R36.1
NetR36_2: R36.2 U9.2 | length 157.4
  Bottom Layer w12: R36.2 1570,1738 1573,1735 U9.2
NetR37_1: R37.1 U7.7 | length 501.3
  Bottom Layer w12: U7.7 3675,1575 3648,1602 3648,1723.33 3653.65,1728.98 3653.65,1851.15 3662.5,1860 R37.1
NetR37_2: R37.2 U11.2 | length 126.2
  Bottom Layer w12: U11.2 R37.2
NetU3_1: U3.1 U4.1 | length 408.6
  Top Layer w12: v1(1080,2595) v1(1080,2755.04)
  Bottom Layer w12: U3.1 v1(1080,2595) ; v1(1080,2755.04) U4.1
NetU3_4: U3.4 U4.2 | length 609.9
  Top Layer w12: v1(1104,2445) 1220,2561 v1(1220,2750)
  Bottom Layer w12: U3.4 v1(1104,2445) ; U4.2 1200,2770 v1(1220,2750)
NetU4_12: U4.12
Sus_Pot_1: "Sus Pot 1.2" R10.2 | length 1745
  Top Layer w12: R10.2 2690,513 2595,418 2595,274.5 2612.5,257 3750.31,257 3882.64,389.33
Sus_Pot_2: "Sus Pot 2.2" R13.2 | length 803.2
  Top Layer w12: R13.2 3193.69,774.16 3217.45,774.16 v2(3242.29,799)
  Bottom Layer w12: v2(3242.29,799) 3296.5,799 3385,887.5 3385,940 3400,955 3626.57,955 3800,781.57
Sus_Pot_TNC_1: B1.26 R10.1 R12.2 | length 294.4
  Top Layer w12: R10.1 2696.89,689.53 2755,747.64 2755,751.42 2813.11,809.53 R12.2 2826.31,809.53 2840,823.21 B1.26
Sus_pot_TNC_2: B1.27 R13.1 R46.2 | length 285.4
  Top Layer w12: B1.27 2940.18,910 3040.18,810 R46.2 3099.53,819.53 R13.1